# EAGLE board ControlPanel (EAGLE 6.1)
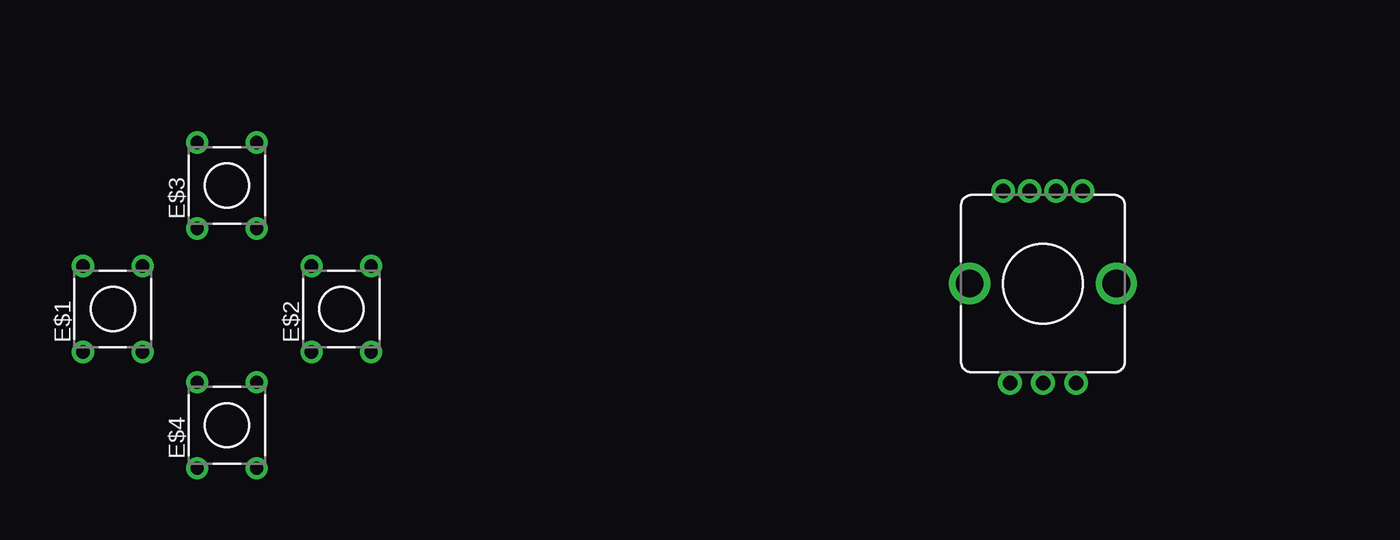
[diagram p0: board, top side]
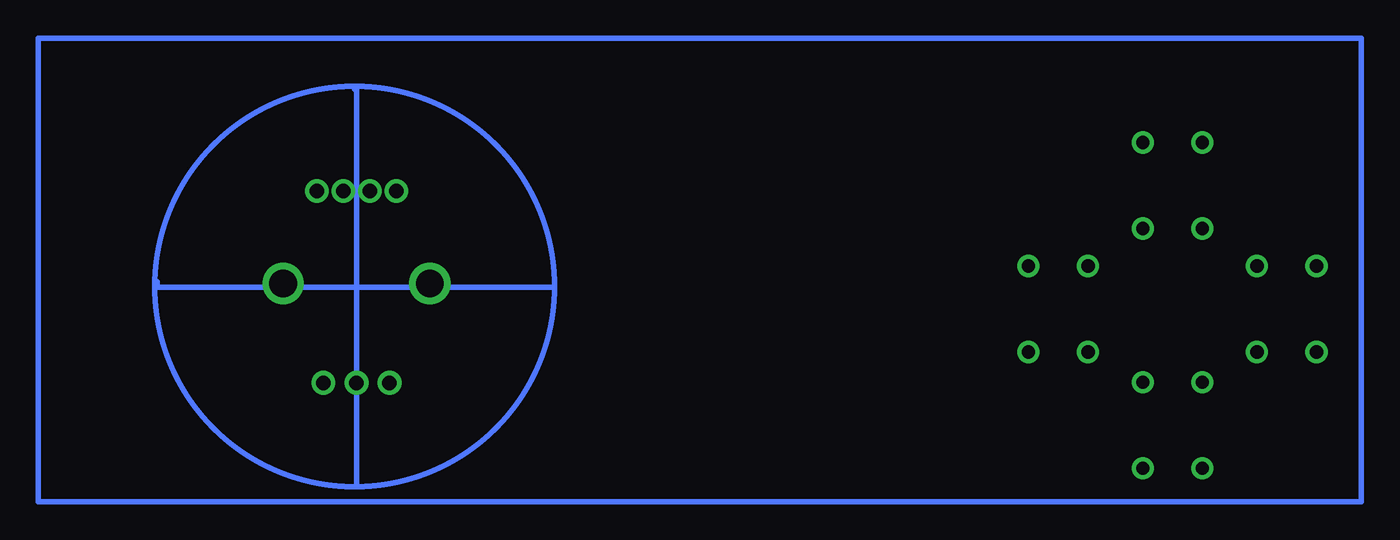
[diagram p1: board, bottom side, seen from below]

No outline drawn. Coordinates in mm, seen from the top.
Copper layers (1*16): Top 0.035mm / dielectric 1.5mm / Bottom 0.035mm
Design rules: minimum track width 10mil, minimum drill 24mil, track to track 8mil, track to pad 8mil, pad to pad 8mil, via to via 8mil, smd to smd 8mil, copper to edge 40mil, drill to drill 8mil, minimum pad ring 10mil, minimum via ring 8mil, stop-mask expansion 4mil, vias tented up to drill 0mil, thermal gap 10mil

## Footprints (pad centres in the part's own frame; a part is rotated, then mirrored left to right if it is on the bottom)
TL1105 = drill 1 pad 1.676: 1 -2.25,3.25; 2 2.25,3.25; 3 -2.25,-3.25; 4 2.25,-3.25
ENCODER_LED_2 = drill 1.1 pad 1.778: +G 1,7; +R -1,7; GND 3,7; SW -3,7 | drill 1.1 pad 1.8: A -2.5,-7.5; B 2.5,-7.5; C 0,-7.5 | drill 2.1: P$1 -5.55,0; P$2 5.55,0

## Placement (x,y rotation side)
E$1  [TL1105]  5.62,14.55 0 top
E$2  [TL1105]  22.9,14.55 0 top
E$3  [TL1105]  14.26,23.88 0 top
E$4  [TL1105]  14.26,5.77 0 top
E$5  [ENCODER_LED_2]  75.95,16.47 0 top

## Library data of the parts
E$1-E$4 = switch
E$5 = SparkFun-Electromechanical

## Tracks (layer width: path | path; a pad name or v marks a point on that pad's centre or on a via)
S$1
  Bottom 0.406: 0,0 100,0 100,35 0,35 0,0
S$2
  Bottom 0.406: 61.01,16.2 91.03,16.2 91.03,16.61
S$3
  Bottom 0.406: 76.09,31.16 75.95,31.16 75.95,1.24
(copper drawn outside any net)
  shapes: Bottom circle x1